# Altium PCB BU.14-AT10.PcbDoc
Units mm, origin at the board's own origin, x right, y up, seen from the top; angles counter-clockwise.
Board outline 50 x 40 mm, 2 copper layers (Top Layer, Bottom Layer); 27 components, 19 nets, 72 pads, 3 vias.
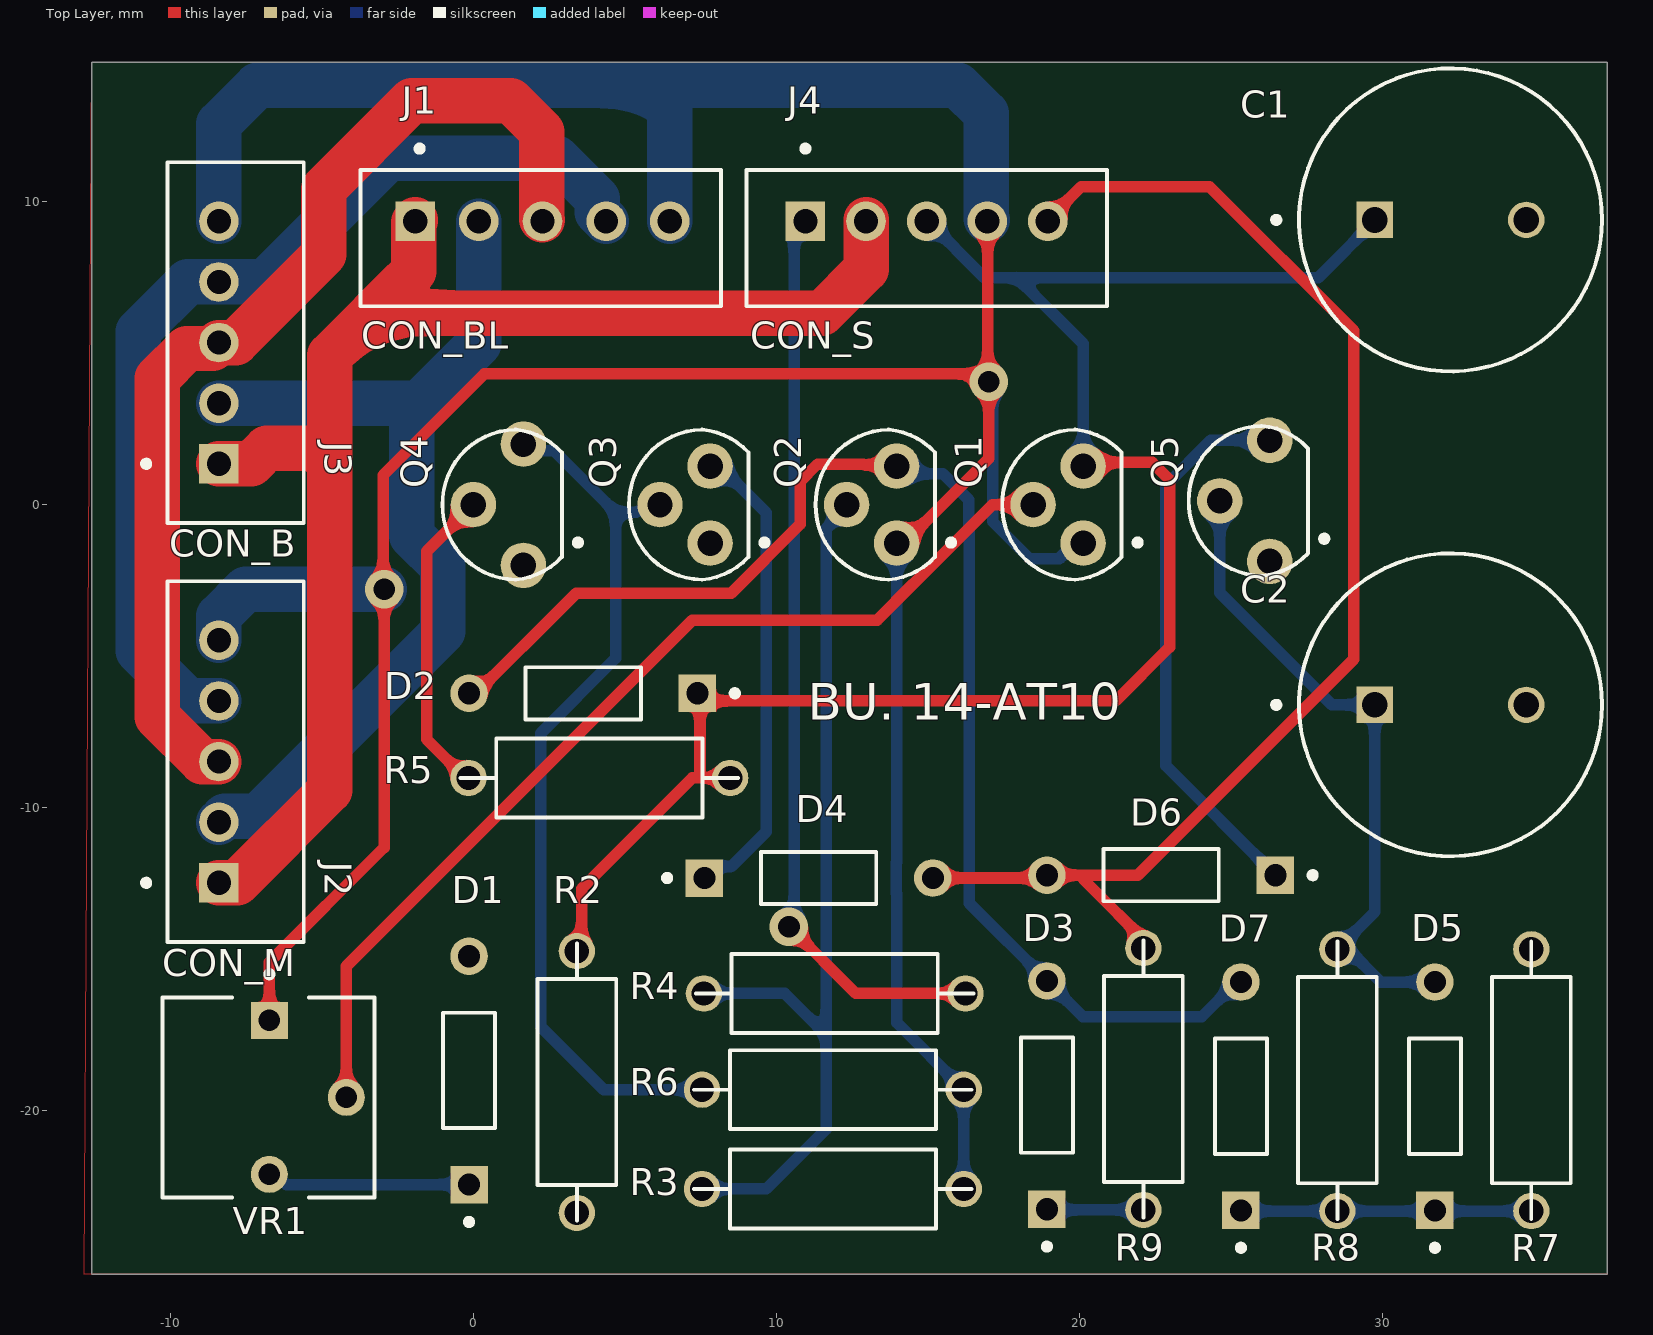
[diagram p0: Top Layer view]
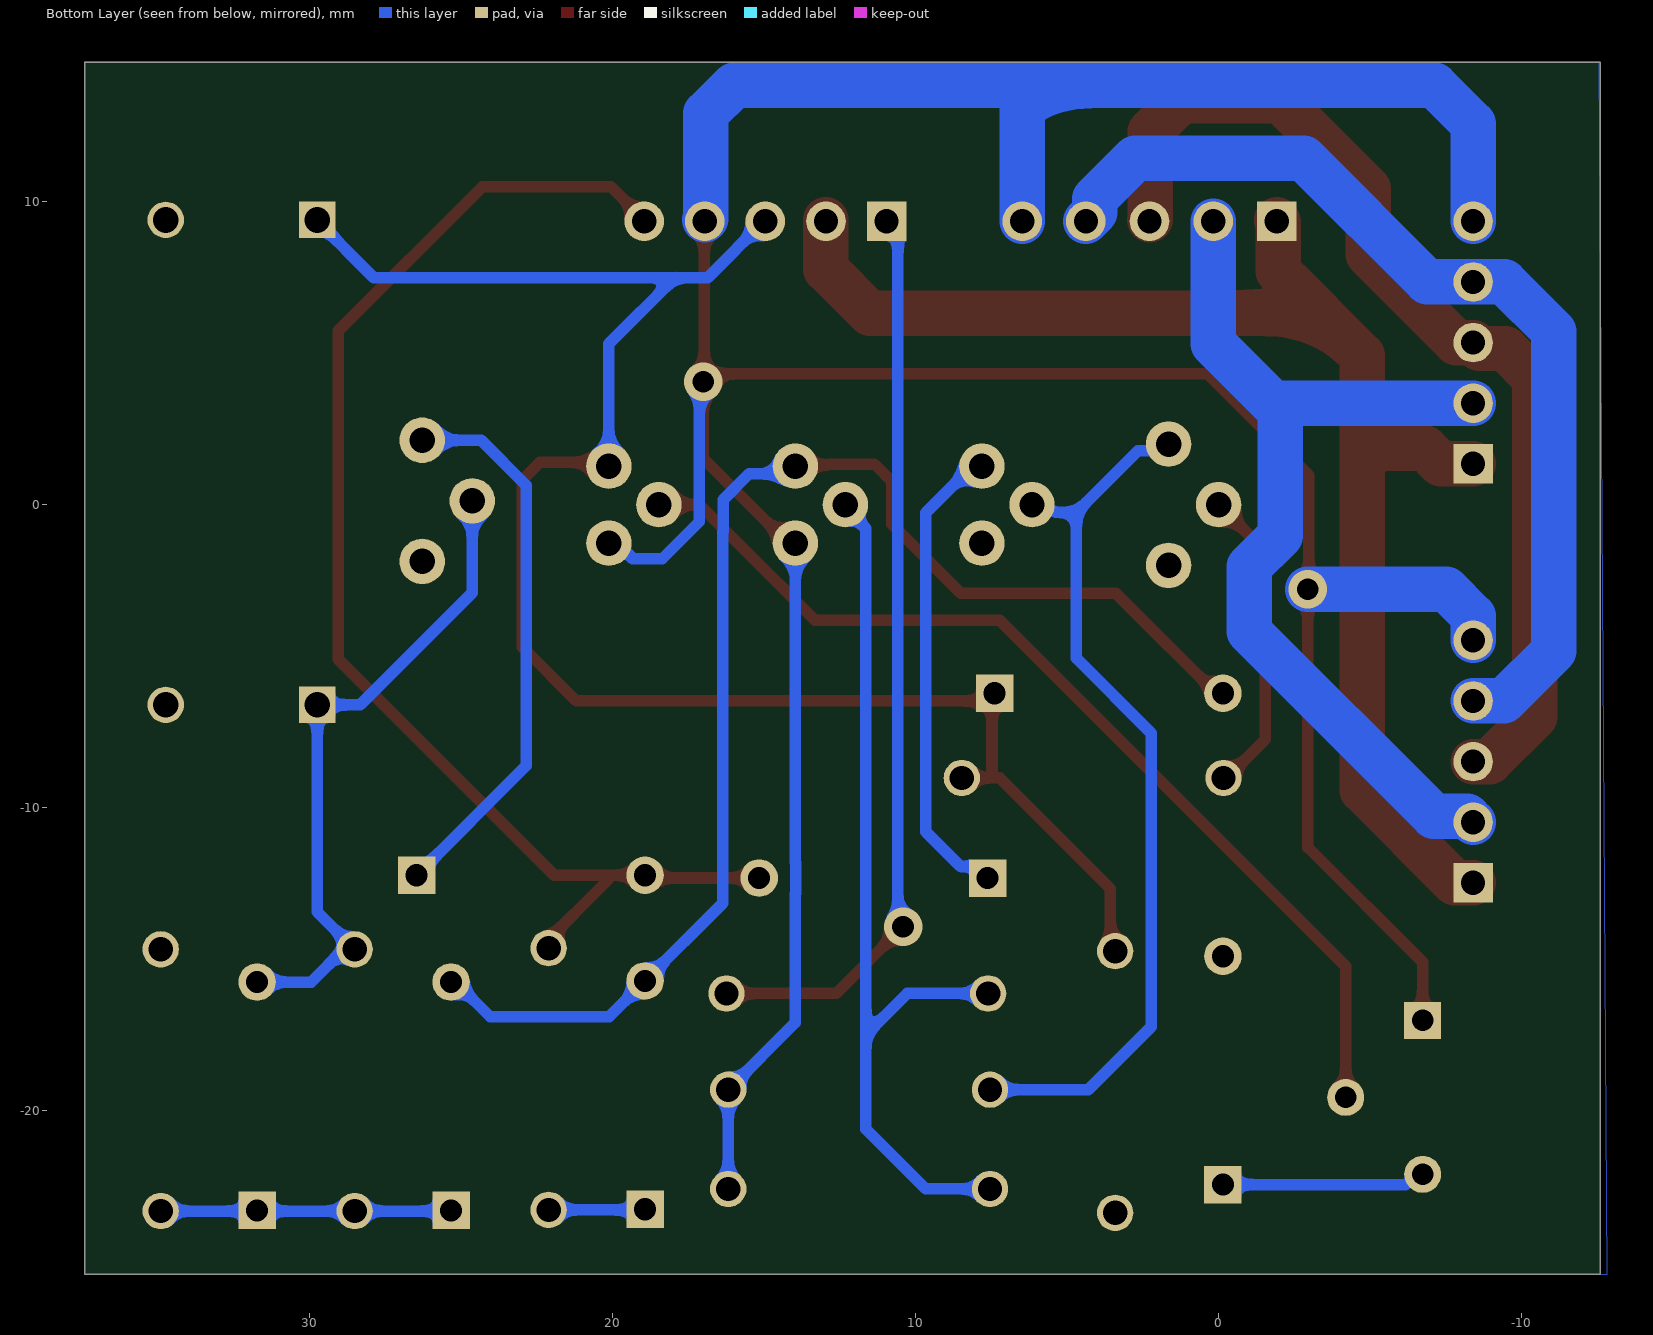
[diagram p1: Bottom Layer view, seen from below]
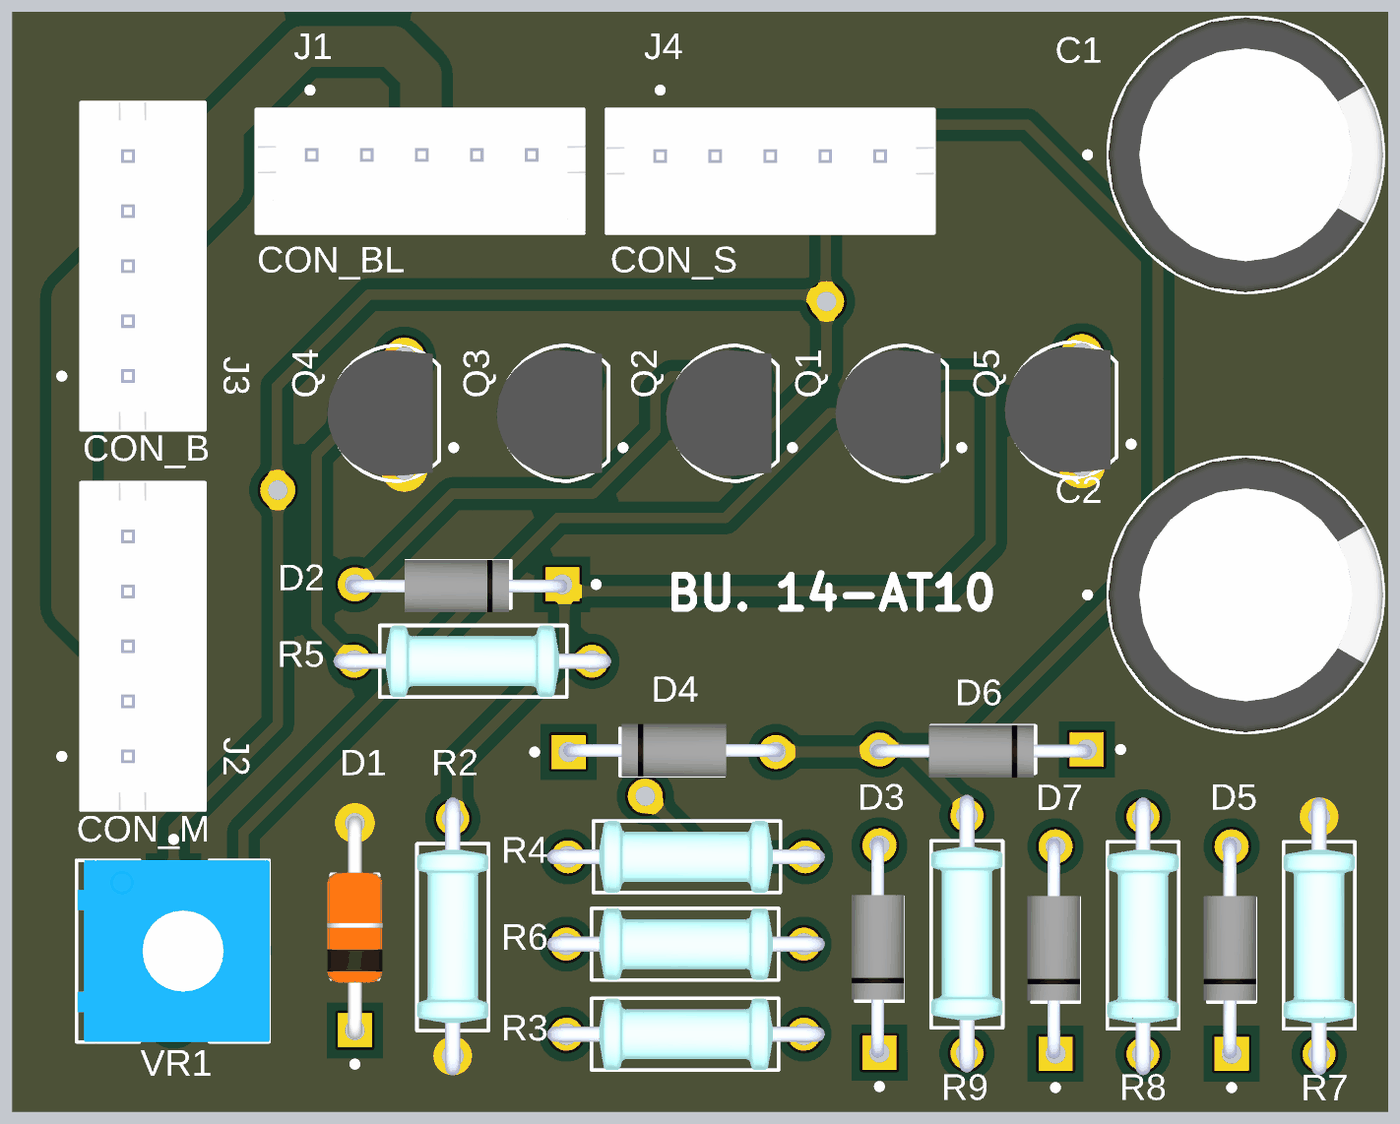
[diagram p2: 3D render of the assembled board from above, using the file's embedded part models]

## Layer stack, top to bottom
Top Solder: solder mask 0.0102, Solder Resist, Dk 3.5
Top Layer: signal copper 0.0356
Dielectric 1: dielectric 0.32, FR-4, Dk 4.8
Bottom Layer: signal copper 0.0356
Bottom Solder: solder mask 0.0102, Solder Resist, Dk 3.5

## Board outline
-12.589,-25.4 -12.589,14.6 37.411,14.6 37.411,-25.4

## Design rules (kind name [scope] priority, off if disabled: settings)
Clearance Clearance_2 [InNamedPolygon('NONET_L-01_P-001')] p1: gap=0.4 ignorepadtopadclearanceinfootprint=FALSE
Clearance Clearance_1 [InNamedPolygon('NONET_L-01_P-001')] p2: gap=0.4 ignorepadtopadclearanceinfootprint=FALSE
Clearance [All] p3: gap=0.4 ignorepadtopadclearanceinfootprint=TRUE
PolygonConnect [All] p1: connectstyle=Direct reliefconductorwidth=0.254 reliefentries=4 polygonreliefangle="90 Angle" airgapwidth=0.254
RoutingVias [All] p1: holewidth=0.711 width=1.27 viastyle="Through Hole" minholewidth=0.711 minwidth=1.27 maxholewidth=0.711 maxwidth=1.27
SolderMaskExpansion [All] p1: expansion=0.102 istentingtop=FALSE
Width [All] p1: maxlimit=3 minlimit=0.3 preferedwidth=0.6
30 further rules are at their usual default settings.

## Components (designator, comment, footprint, x,y, rotation, side; value= is the part's Value field where it differs from the comment)
C1 "ELCO" 10mmELCO 32.242,9.398 r0 top
C2 "ELCO" 10mmELCO 32.242,-6.604 r0 top
D1 "Zener" Zener -0.143,-18.669 r90 top
D2 "Dioda" "1N4148 - duplicate" 3.625,-6.223 r180 top
D3 "Dioda" "1N4148 - duplicate" 18.926,-19.483 r90 top
D4 "Dioda" "1N4148 - duplicate" 11.391,-12.319 r0 top
D5 "Dioda" "1N4148 - duplicate" 31.727,-19.521 r90 top
D6 "Dioda" "1N4148 - duplicate" 22.694,-12.227 r180 top
D7 "Dioda" "1N4148 - duplicate" 25.326,-19.521 r90 top
J1 "CON_BL" 5POS2.1mm 6.479,9.349 r180 top
J2 "CON_M" 5POS2mm -7.848,-8.477 r270 top
J3 "CON_B" 5POS2mm -7.848,5.349 r270 top
J4 "CON_S" 5POS2mm 14.956,8.799 r180 top
Q1 "Transistor P" TO-92#1 20.121,1.27 r90 top
Q2 "Transistor P" TO-92#1 13.965,1.27 r90 top
Q3 "Transistor N" TO-92#1 7.808,1.27 r90 top
Q4 "MOS N" TO-92#2 1.651,1.27 r90 top
Q5 "MOS N" TO-92#2 26.278,1.397 r90 top
R2 "R" "DIP Resistor" 3.413,-19.05 r90 top
R3 "R" "DIP Resistor" 11.862,-22.58 r0 top
R4 "R" "DIP Resistor" 11.922,-16.129 r180 top
R5 "R" "DIP Resistor" 4.156,-9.017 r180 top
R6 "R" "DIP Resistor" 11.862,-19.304 r0 top
R7 "R" "DIP Resistor" 34.909,-18.99 r270 top
R8 "R" "DIP Resistor" 28.508,-18.99 r270 top
R9 "R" "DIP Resistor" 22.107,-18.952 r90 top
VR1 "Potentiometer" Trimpot -6.734,-19.558 r270 top

## Footprints (in the part's own frame and the unit in brackets; to place one, negate y for a bottom-side part, rotate by r counter-clockwise, add the part's x,y. Pads: shape width x height; smd on the part's side, far side on the other; paste and mask are expansions set on the pad)
"1N4148 - duplicate" [mm]
  round 1.238 hole 0.73: A(3.768,0)
  rect 1.238x1.238 / inner round 1.238 / far side rect 1.238x1.238 hole 0.73: K(-3.768,0)
  silkscreen extent -5.1,-0.86 1.9,0.86, body extent -3.94,-0.89 4.06,1.02, height 1.9
5POS2.1mm [mm]
  rect 1.308x1.308 / inner round 1.308 / far side rect 1.308x1.308 hole 0.8: 1(8.4,0)
  round 1.308 hole 0.8: 2(6.3,0) 3(4.2,0) 4(2.1,0) 5(0,0)
  silkscreen extent -1.7,-2.5 10.2,2.8, body extent -1.76,-1.74 10.14,2.76, height 6
5POS2mm [mm]
  rect 1.308x1.308 / inner round 1.308 / far side rect 1.308x1.308 hole 0.8: 1(4,-0.55)
  round 1.308 hole 0.8: 2(2,-0.55) 3(0,-0.55) 4(-2,-0.55) 5(-4,-0.55)
  silkscreen extent -5.95,-3.05 5.95,2.25, body extent -5.95,-2.25 5.95,2.25, height 6
10mmELCO [mm]
  round 1.2 hole 0.85: N(2.5,0)
  rect 1.2x1.2 hole 0.85: P(-2.5,0)
  silkscreen extent -5.85,-5 5,5, body extent -5,-5 5,5, height 12.5
"DIP Resistor" [mm]
  round 1.2 hole 0.8: 1(-4.318,0) 2(4.318,0)
  silkscreen extent -4.58,-1.3 4.58,1.3, body extent -5.02,-1.3 5.08,1.3, height 2.59
TO-92#1 [mm]
  round 1.5 hole 0.84: 1(-2.54,0) 2(-1.27,1.651) 3(0,0)
  silkscreen extent -3.75,-1.9 1.21,2.67, body extent -3.55,-1.04 1.01,2.79, height 7.74
TO-92#2 [mm]
  round 1.5 hole 0.84: 1(-3.27,0) 2(-1.27,1.651) 3(0.73,0)
  silkscreen extent -3.75,-1.9 1.21,2.67, body extent -3.55,-1.04 1.01,2.79, height 7.74
Trimpot [mm]
  rect 1.222x1.222 / inner round 1.222 / far side rect 1.222x1.222 hole 0.714: 1(-2.54,0)
  round 1.222 hole 0.714: 2(0,2.54) 3(2.54,0)
  silkscreen extent -4.16,-3.53 3.3,3.47, body extent -3.3,-3.49 3.3,3.49, height 4.88
Zener [mm]
  round 1.238 hole 0.73: A(3.768,0)
  rect 1.238x1.238 / inner round 1.238 / far side rect 1.238x1.238 hole 0.73: K(-3.768,0)
  silkscreen extent -5.1,-0.86 1.9,0.86, body extent -4.09,-1 4.03,1, height 1.01

## Part data
C1 C2: "Cap Aluminum Lytic 22uF 10V 20% (4 X 7mm) Radial 1.5mm 30mA 1000h 105C Bulk", Package="RADIAL-2 Panasonic", Availability="In Stock", Check_prices=https://www.snapeda.com/parts/EEA-GA1A220/Panasonic/view-part/454477/?ref=eda, MF=Panasonic, MP=EEA-GA1A220, Price=None, Purchase-URL=https://pricing.snapeda.com/search/part/EEA-GA1A220/?ref=eda, SnapEDA_Link=https://www.snapeda.com/parts/EEA-GA1A220/Panasonic/view-part/454477/?ref=snap
D1 D2 D3 D4 D5 D6 D7: Package=None, Availability=Unavailable, MP=P6KE36A, Price=None
J1: library part "5P JST 2.1", "Connector Header Through Hole 5 position 0.098 (2.50mm)", Package=None, Check_prices=https://www.snapeda.com/parts/B5B-XH-A(LF)(SN)/JST+Sales+America+Inc./view-part/?ref=eda, MF="JST Sales America Inc.", MP=B5B-XH-A(LF)(SN), SnapEDA_Link=https://www.snapeda.com/parts/B5B-XH-A(LF)(SN)/JST+Sales+America+Inc./view-part/?ref=snap
J2 J3 J4: library part "5P JST 2.0", "Connector Header Through Hole 5 position 0.098 (2.50mm)", Package=None, Check_prices=https://www.snapeda.com/parts/B5B-XH-A(LF)(SN)/JST+Sales+America+Inc./view-part/?ref=eda, MF="JST Sales America Inc.", MP=B5B-XH-A(LF)(SN), SnapEDA_Link=https://www.snapeda.com/parts/B5B-XH-A(LF)(SN)/JST+Sales+America+Inc./view-part/?ref=snap
Q1 Q2: "Transistor PNP 2SA1015/2SA1015Y TOSHIBA miliampere=150 V=50 TO92", Package="TO-92 Toshiba", Check_prices=https://www.snapeda.com/parts/2SA1015-Y/Toshiba/view-part/?ref=eda, MF=Toshiba, MP=2SA1015-Y, SnapEDA_Link=https://www.snapeda.com/parts/2SA1015-Y/Toshiba/view-part/?ref=snap
Q3: "TRANS NPN 40V 200MA TO92-3", Package="TO-226-3 Rectron", Availability="In Stock", Check_prices=https://www.snapeda.com/parts/2N3904/Rectron/view-part/?ref=eda, MF=Rectron, MP=2N3904, Price=None, Purchase-URL=https://pricing.snapeda.com/search/part/2N3904/?ref=eda, SnapEDA_Link=https://www.snapeda.com/parts/2N3904/Rectron/view-part/?ref=snap
Q4 Q5: "MOSFET TO-220 N-CH 50V 30A", Package="TO-220-3 STMicroelectronics", Check_prices=https://www.snapeda.com/parts/BUZ71/STMicroelectronics/view-part/?ref=eda, MF=STMicroelectronics, MP=BUZ71, SnapEDA_Link=https://www.snapeda.com/parts/BUZ71/STMicroelectronics/view-part/?ref=snap
R2 R3 R4 R5 R6 R7 R8 R9: "1.33 kOhms Â±1% 0.25W, 1/4W Through Hole Resistor Axial Metal Film", Package="Axial Yageo", Arrow_Electronics-Purchase-URL=https://snapeda.com/shop?store=Arrow+Electronics&id=3223064, DigiKey-Purchase-URL=https://snapeda.com/shop?store=DigiKey&id=3223064, MF=Yageo, Mouser-Purchase-URL=https://snapeda.com/shop?store=Mouser&id=3223064, MP=MFR-25FBF52-1K33, SnapEDA_Link=https://www.snapeda.com/parts/MFR-25FBF52-1K33/Yageo/view-part/3223064/?ref=snap
VR1: "10 mm, Vertical, Logarithmic, 50 kÎ©, Through Hole, D-cut Rotary Potentiometer", Package=None, Check_prices=https://www.snapeda.com/parts/PT01-D225D-A503/Same+Sky/view-part/?ref=eda, MF="Same Sky", MP=PT01-D225D-A503, SnapEDA_Link=https://www.snapeda.com/parts/PT01-D225D-A503/Same+Sky/view-part/?ref=snap

## Via types
v1: diameter 1.27, hole 0.711, Top Layer to Bottom Layer, 3 vias

## Nets (pads, with @x,y where several pads share a name; then routed paths per layer and width w, separated by ;. In a path a pad name is that pad's centre, name@x,y a point inside that pad or via, vN(x,y) a via of type N, cw(c..) or ccw(c..) an arc to the next point about the centre after c; other vN are vias at no path point)
NetC1_N: C1.N C2.N D1.A J1.1 J2.1 J3.1 J4.2 Q3.1 Q4.1 Q5.1 R2.1 R7.1 | length 47.2
  Top Layer w1.5: J2.1 -7.794,-12.477 -4.733,-9.416 -4.733,1.614 -4.733,4.935 -3.356,6.312 ; J3.1 -7.334,1.35 -6.826,1.858 -5.213,1.858 -4.969,1.614 ; J1.1@-1.921,9.398 -1.921,9.374 -1.971,9.325 -1.971,7.698 -3.356,6.312 ; J4.2@12.956,9.398 12.956,7.765 11.503,6.312 -3.356,6.312
NetC1_P: C1.P D2.K J4.3 Q1.3 R2.2 R5.1 | length 60.1
  Top Layer w0.381: R2.2 3.569,-14.575 3.569,-12.67 7.223,-9.017 7.477,-9.017 ; R5.1@8.764,-9.017 R5.1 7.477,-9.017 ; Q1.3@20.089,1.397 22.394,1.397 22.971,0.82 22.971,-4.699 21.193,-6.477 7.878,-6.477 7.624,-6.223 7.477,-6.37 7.477,-9.017
  Bottom Layer w0.381: J4.3@14.956,9.398 16.861,7.493 17.937,7.493 ; Q1.3 20.121,5.309 17.937,7.493 ; C1.P@29.782,9.398 27.877,7.493 17.937,7.493
NetC2_P: C2.P D5.A Q5.2 R8.1 | length 22.1
  Bottom Layer w0.381: Q5.2 24.627,-2.91 28.321,-6.604 C2.P 29.742,-13.438 R8.1 28.863,-14.672 29.943,-15.752 D5.A@31.905,-15.752
NetD1_K: D1.K VR1.3 | length 6.7
  Bottom Layer w0.381: VR1.3 -6.507,-22.098 -6.167,-22.437 D1.K
NetD2_A: D2.A D3.A D7.A Q2.3 | length 45
  Top Layer w0.381: D2.A@-0.203,-6.513 3.389,-2.921 8.504,-2.921 10.779,-0.646 10.779,0.762 11.357,1.341 12.869,1.341 12.899,1.311 13.961,1.311 Q2.3@14.002,1.27
  Bottom Layer w0.381: Q2.3@14.208,1.016 15.494,1.016 16.349,0.161 16.349,-0.879 16.367,-0.897 16.367,-11.816 16.369,-11.818 16.369,-12.82 16.367,-12.822 16.367,-13.155 D3.A 20.103,-16.891 24.041,-16.891 D7.A@25.18,-15.752
NetD3_K: D3.K R9.1 | length 3.5
  Bottom Layer w0.381: D3.K 18.945,-23.27 R9.1@22.4,-23.27
NetD4_A: D4.A D6.A J4.5 R9.2 | length 43.1
  Top Layer w0.381: D4.A@15.478,-12.319 D6.A@18.926,-12.319 ; D6.A 20.116,-12.227 21.92,-12.227 29.046,-5.101 29.046,5.736 24.289,10.492 20.05,10.492 J4.5@18.956,9.398 ; 20.116,-12.35 R9.2@22.4,-14.634
NetD4_K: D4.K Q3.3 | length 15.5
  Bottom Layer w0.381: D4.K 8.006,-11.936 8.523,-11.936 9.664,-10.795 9.664,-0.262 8.346,1.056 8.082,1.056 Q3.3@7.99,1.148
NetD5_K: D5.K D7.K R7.2 R8.2 | length 9.1
  Bottom Layer w0.381: D7.K@25.86,-23.289 25.879,-23.308 28.863,-23.308 31.886,-23.308 31.905,-23.289 31.924,-23.308 R7.2
NetD6_K: D6.K Q5.3 | length 18.6
  Bottom Layer w0.381: Q5.3 24.336,2.127 22.844,0.635 22.844,-8.608 D6.K D6.K@26.615,-12.379
NetJ1_2: J1.2 J2.2 J3.2 | length 31.4
  Bottom Layer w1.5: J2.2 -8.202,-10.281 -7.106,-10.281 -1.006,-4.181 -1.006,-2.049 -2.032,-1.023 -2.032,3.35 ; J3.2 -1.784,3.35 0.179,5.312 J1.2
NetJ1_3: J1.3 J2.3 J3.3 | length 34.9
  Top Layer w1.5: J2.3 -8.95,-8.477 -10.43,-6.996 -10.43,4.177 -9.454,5.154 -8.594,5.154 J3.3 -7.847,5.349 -4.939,8.257 -4.939,10.427 -2.031,13.335 1.236,13.335 2.261,12.31 2.261,9.416 J1.3@2.279,9.398
NetJ1_4: J1.4 J2.4 J3.4 | length 32.8
  Bottom Layer w1.5: J2.4 -9.414,-6.477 -11.065,-4.826 -11.065,5.715 -9.431,7.349 -6.891,7.349 -2.81,11.43 2.749,11.43 4.083,10.097 4.083,9.645 J1.4
NetJ1_5: J1.5 J2.5 J3.5 J4.4 Q1.1 Q2.1 R3.2 R6.2 VR1.1 | length 127.9
  Top Layer w0.381: VR1.1 -6.734,-15.1 -2.948,-11.314 v1@-2.948,-2.805 ; v1@-2.983,-2.794 -2.983,0.971 0.365,4.318 v1@16.748,4.318 ; Q2.1 14.208,-1.27 17.002,1.524 v1(17.002,4.064) 16.843,4.223 16.97,4.35 16.97,9.384 J4.4@16.956,9.398
  Bottom Layer w0.381: Q2.1 13.965,-11.804 13.95,-11.818 13.95,-12.82 13.965,-12.834 13.965,-17.089 R6.2 R3.2 ; v1(17.002,4.064) 17.13,3.936 17.13,-0.555 18.353,-1.778 19.339,-1.778 19.847,-1.27 Q1.1
  Bottom Layer w1.5: J2.5 -8.398,-3.673 -7.52,-2.794 v1(-2.948,-2.794) ; J3.5 -8.398,12.573 -7.128,13.843 5.699,13.843 ; J1.5 6.479,13.063 5.699,13.843 ; J4.4@16.956,9.398 16.915,9.438 16.915,12.913 15.986,13.843 5.699,13.843
NetJ4_1: J4.1 R4.1 | length 30.3
  Top Layer w0.381: v1(10.413,-13.922) 12.62,-16.129 R4.1
  Bottom Layer w0.381: v1(10.413,-13.922) 10.583,-13.752 10.583,9.025 J4.1@10.956,9.398
NetQ1_2: Q1.2 VR1.2 | length 33.9
  Top Layer w0.381: VR1.2 -4.194,-15.227 7.223,-3.81 13.319,-3.81 14.518,-2.611 14.52,-2.611 15.305,-1.825 15.305,-1.824 17.129,0 Q1.2 Q1.2@18.877,0.407
NetQ2_2: Q2.2 R3.1 R4.2 | length 30.5
  Bottom Layer w0.381: R3.1 9.662,-22.58 11.638,-20.603 11.638,-17.497 ; R4.2 10.271,-16.129 11.638,-17.497 ; Q2.2@12.245,0.069 11.922,-0.254 12.002,-0.334 12.002,-0.419 11.638,-0.783 11.638,-17.497
NetQ3_2: Q3.2 Q4.3 R6.1 | length 29.9
  Bottom Layer w0.381: Q4.3@1.426,1.778 1.434,1.786 2.426,1.786 2.434,1.778 2.659,1.778 4.691,-0.254 ; Q3.2@6.244,-0.214 5.414,-0.214 5.374,-0.254 4.691,-0.254 ; R6.1 4.302,-19.304 2.222,-17.224 2.222,-7.541 4.691,-5.072 4.691,-0.254
NetQ4_2: Q4.2 R5.2 | length 10.6
  Top Layer w0.381: Q4.2 -1.54,-1.54 -1.54,-7.747 -0.427,-8.86 -0.029,-8.86 R5.2@0.128,-9.017

## Polygon pours and split planes (outlines as drawn)
NetC1_N on Top Layer "NONET_L-01_P-001" (solid, shelved, pour order 0): -12.589,14.6 37.411,14.6 37.411,-25.4 -12.843,-25.4
NetC1_N on Bottom Layer "NONET_L-01_P-001" (solid, shelved, pour order 1): -12.569,14.6 37.431,14.6 37.431,-25.4 -12.823,-25.4

## Silkscreen, mask and mechanical layers (free items; w line width, h text height)
Top Overlay:
  text "BU. 14-AT10" at 11.033,-7.102 h1.2